# EAGLE board AdapterBoard (EAGLE 5.10)
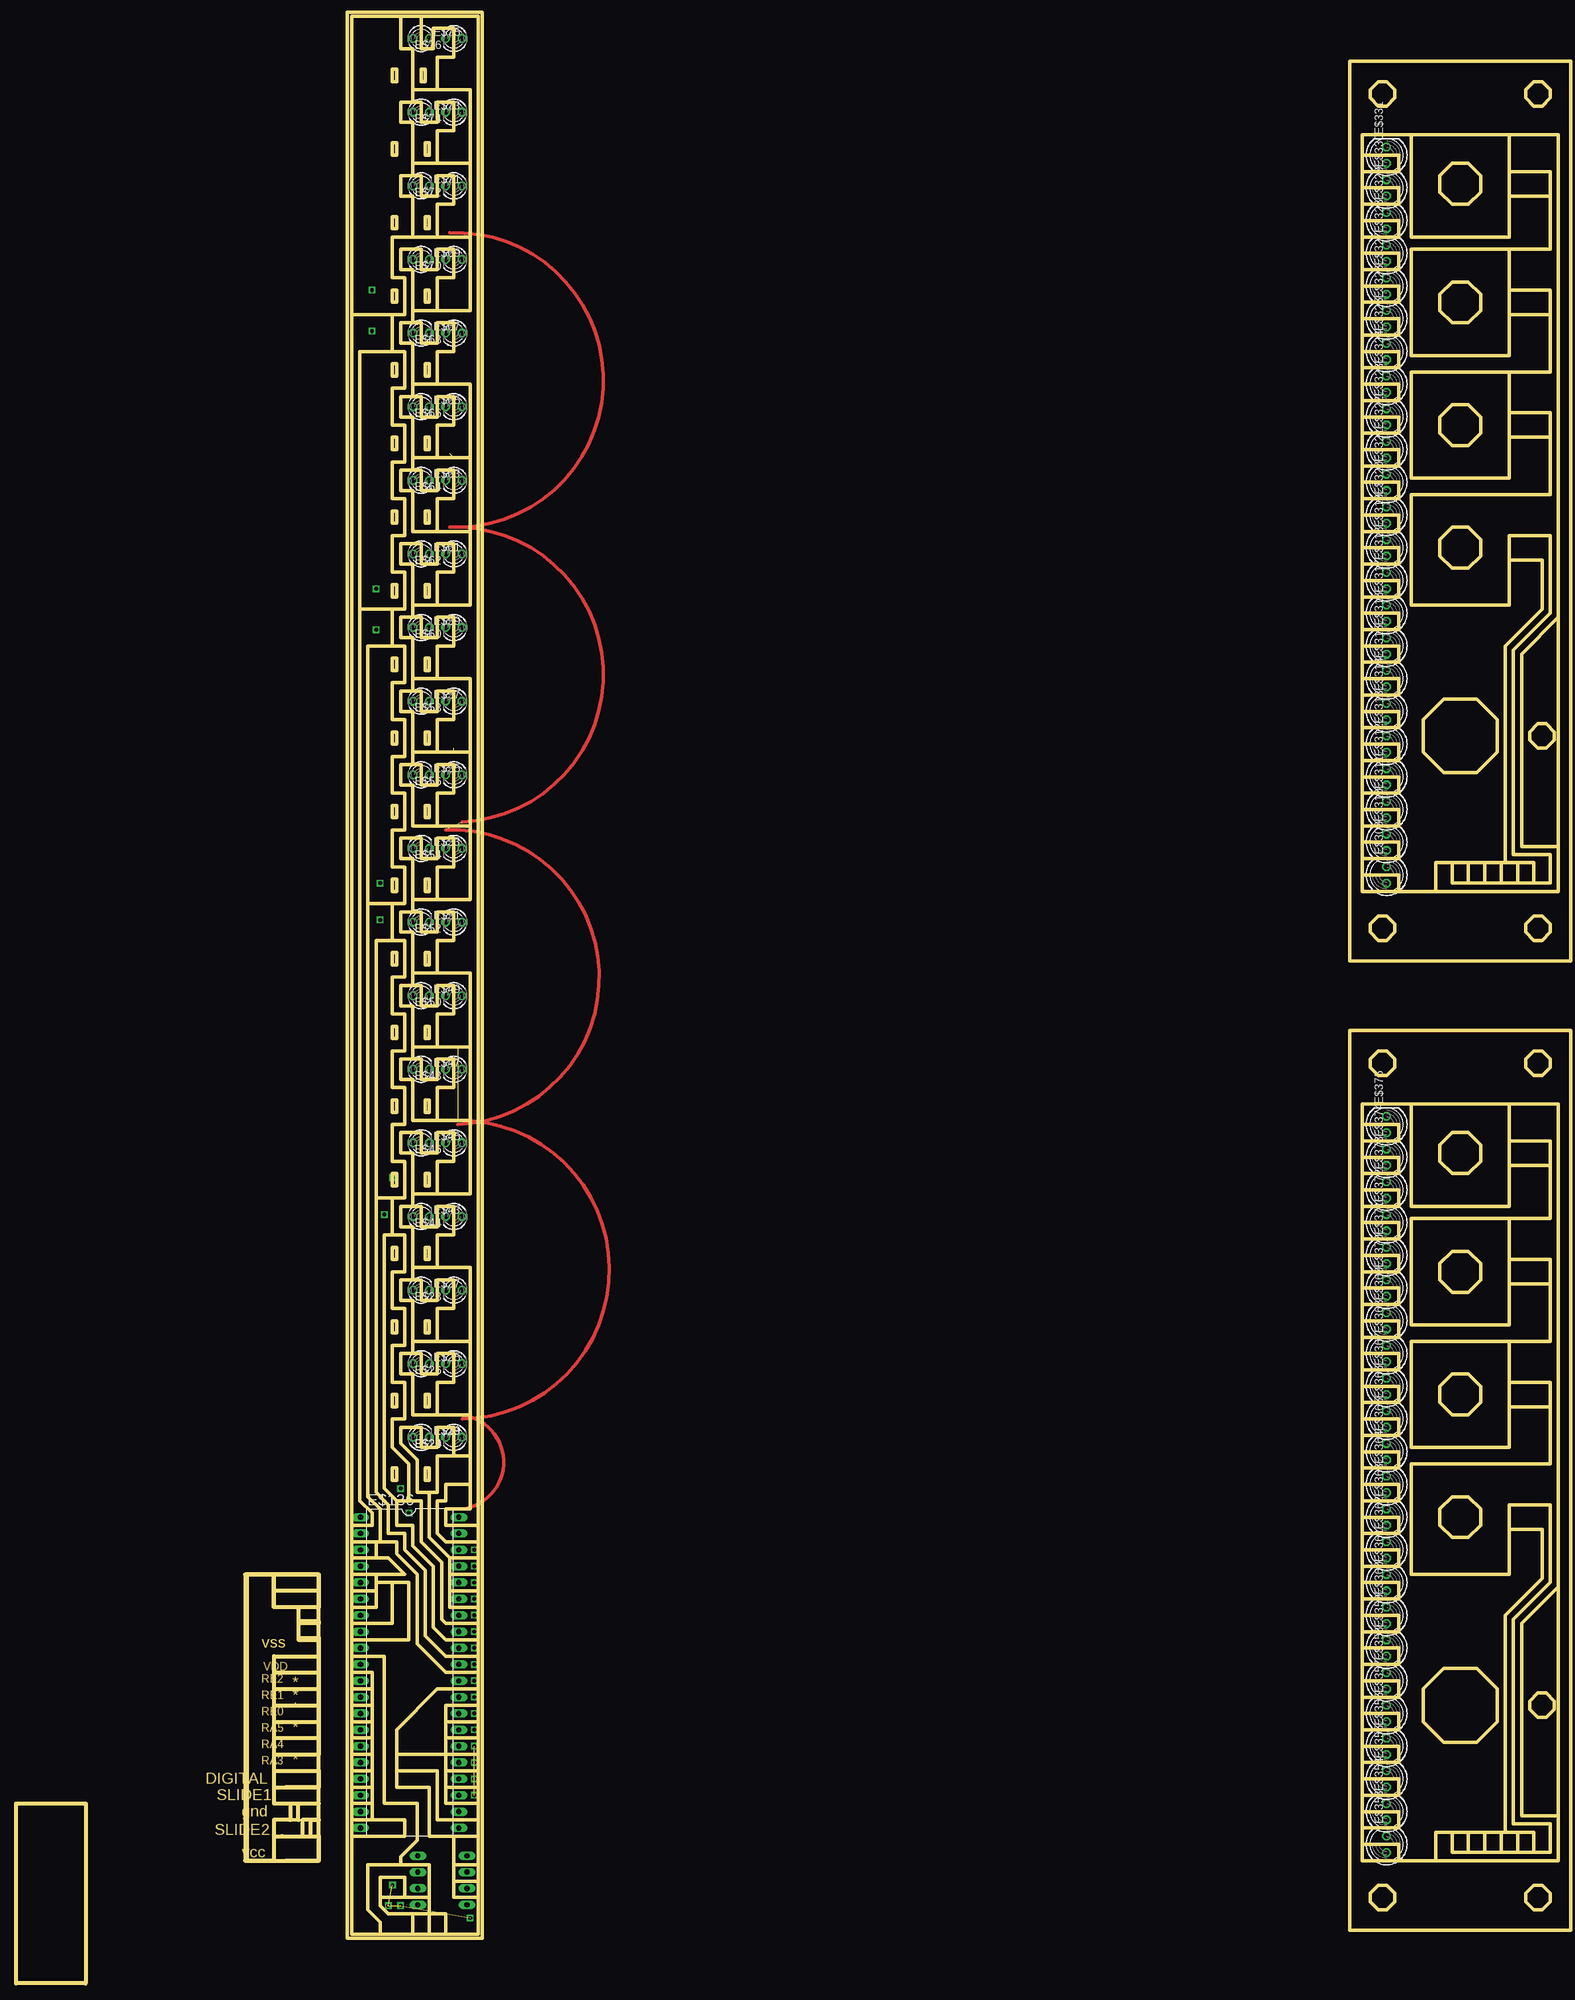
[diagram p0: board, top side]
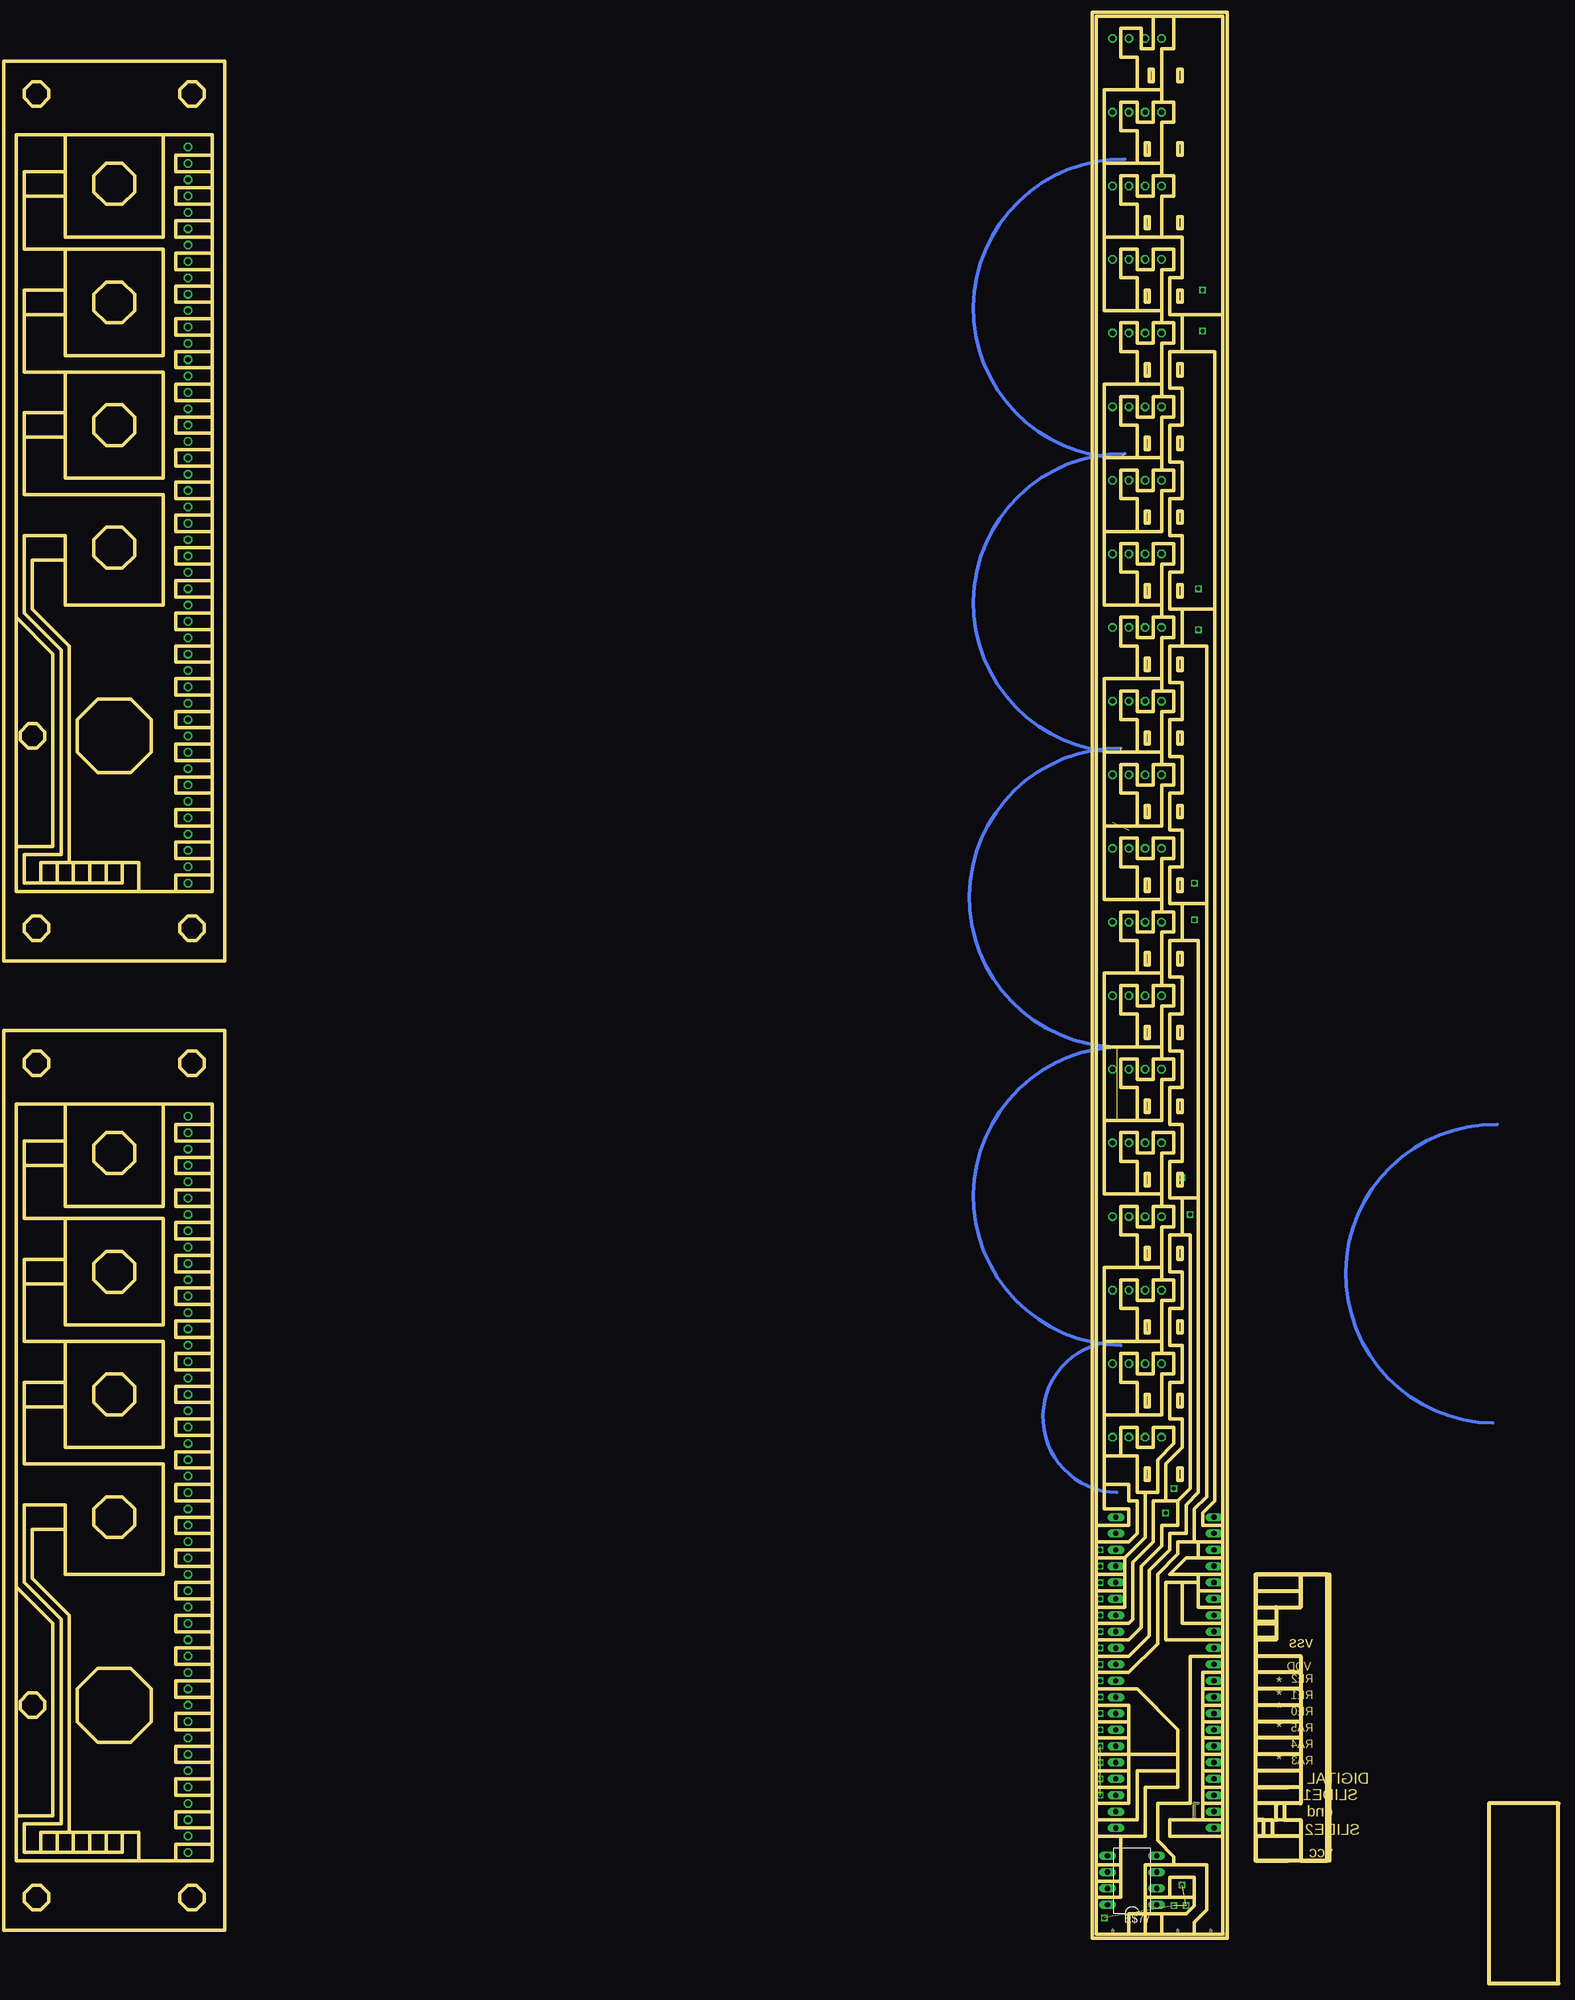
[diagram p1: board, bottom side, seen from below]

Size 239.4 x 305.44 mm. Coordinates in mm from the lower left corner, seen from the top.
Outline: 71.75,71.12 71.75,68.58
Outline: 71.75,68.58 71.75,66.04
Outline: 71.75,66.04 71.75,63.5
Outline: 71.75,63.5 71.75,60.96
Outline: 71.75,58.42 71.75,55.88
Outline: 71.75,48.26 71.75,45.72
Outline: 71.75,38.1 71.75,35.56
Outline: 71.75,35.56 71.75,33.02
Outline: 71.75,33.02 71.75,30.48
Outline: 71.75,30.48 71.75,27.94
Outline: 71.75,27.94 71.75,25.4
Outline: 71.75,25.4 71.75,22.86
Outline: 71.75,22.86 67.95,22.86
Outline: 52.07,22.86 52.07,25.4
Outline: 52.07,25.4 52.07,27.94
Outline: 52.07,27.94 52.07,30.48
Outline: 52.07,30.48 52.07,33.02
Outline: 52.07,33.02 52.07,35.56
Outline: 52.07,35.56 52.07,38.1
Outline: 52.07,38.1 52.07,40.64
Outline: 52.07,40.64 52.07,43.18
Outline: 52.07,43.18 52.07,45.72
Outline: 52.07,45.72 52.07,48.26
Outline: 52.07,48.26 52.07,50.8
Outline: 52.07,50.8 52.07,53.34
Outline: 52.07,53.34 52.07,55.88
Outline: 52.07,55.88 52.07,58.42
Outline: 52.07,58.42 52.07,60.96
Outline: 52.07,60.96 52.07,63.5
Outline: 52.07,66.04 52.07,68.58
Outline: 56.52,68.58 55.88,68.58
Outline: 52.07,58.42 55.88,58.42 55.88,60.96
Outline: 71.75,58.42 67.31,58.42 67.31,60.96
Outline: 71.75,58.42 71.75,60.96
Outline: 71.75,60.96 67.31,60.96
Outline: 67.31,60.96 67.31,63.5
Outline: 71.75,63.5 67.31,63.5
Outline: 67.31,63.5 67.31,66.04
Outline: 71.75,66.04 67.31,66.04
Outline: 52.07,66.04 52.07,63.5
Outline: 52.07,63.5 55.88,63.5
Outline: 55.88,63.5 55.88,62.23
Outline: 55.88,62.23 55.88,60.96
Outline: 55.88,60.96 52.07,60.96
Outline: 71.75,48.26 71.75,50.8
Outline: 71.75,50.8 71.75,53.34
Outline: 71.75,53.34 71.75,55.88
Outline: 52.07,25.4 55.25,25.4
Outline: 55.25,25.4 60.33,25.4 60.33,22.86 52.07,22.86
Outline: 59.05,33.02 59.05,30.48 64.14,30.48 64.14,22.86 67.95,22.86
Outline: 59.05,33.02 65.41,33.02 65.41,25.4 71.75,25.4
Outline: 59.05,33.02 59.05,35.56
Outline: 59.05,35.56 66.67,35.56
Outline: 66.67,35.56 66.67,33.02
Outline: 66.67,33.02 66.67,30.48
Outline: 66.67,30.48 66.67,27.94 71.75,27.94
Outline: 55.25,25.4 55.25,27.94
Outline: 55.25,27.94 55.25,30.48
Outline: 55.25,30.48 55.25,33.02
Outline: 55.25,33.02 55.25,35.56
Outline: 55.25,35.56 55.25,38.1
Outline: 55.25,38.1 55.25,40.64
Outline: 55.25,40.64 55.25,43.18
Outline: 55.25,43.18 55.25,45.72
Outline: 55.25,45.72 55.25,48.26 52.07,48.26
Outline: 52.07,50.8 57.15,50.8 57.15,27.94 62.23,27.94 62.23,22.23 59.69,19.68 59.69,18.41
Outline: 55.25,27.94 52.07,27.94
Outline: 52.07,30.48 55.25,30.48
Outline: 52.07,33.02 55.25,33.02
Outline: 52.07,35.56 55.25,35.56
Outline: 52.07,38.1 55.25,38.1
Outline: 52.07,40.64 55.25,40.64
Outline: 52.07,43.18 55.25,43.18
Outline: 52.07,45.72 55.25,45.72
Outline: 71.75,45.72 71.75,43.18
Outline: 71.75,43.18 71.75,40.64
Outline: 71.75,40.64 71.75,38.1
Outline: 66.67,35.56 71.75,35.56
Outline: 66.67,33.02 71.75,33.02
Outline: 66.67,30.48 71.75,30.48
Outline: 52.07,55.88 58.42,55.88 58.42,62.23
Outline: 66.67,40.64 66.67,43.18 71.75,43.18
Outline: 66.67,40.64 66.67,38.1
Outline: 66.67,38.1 66.67,35.56
Outline: 71.75,38.1 66.67,38.1
Outline: 71.75,40.64 66.67,40.64
Outline: 71.75,45.72 65.41,45.72 59.05,39.37 59.05,35.56
Outline: 52.07,22.86 52.07,7.62 56.52,7.62
Outline: 56.52,7.62 61.59,7.62
Outline: 61.59,7.62 64.14,7.62
Outline: 64.14,7.62 66.67,7.62
Outline: 66.67,7.62 71.75,7.62 71.75,13.34
Outline: 71.75,13.34 71.75,15.88
Outline: 71.75,15.88 71.75,18.41
Outline: 71.75,18.41 71.75,22.86
Outline: 71.75,71.12 66.67,71.12 66.67,73.66 70.48,73.66 70.48,77.47
Outline: 52.07,53.34 60.96,53.34 60.96,62.23 58.42,62.23
Outline: 71.75,48.26 66.67,48.26 62.23,52.7 62.23,63.5 59.05,66.67 59.05,68.58 56.52,68.58
Outline: 71.75,50.8 66.67,50.8 63.5,53.98 63.5,64.14 60.33,67.31 60.33,69.85 57.79,69.85 57.79,74.3 55.88,76.2 55.88,121.92
Outline: 71.75,53.34 66.67,53.34 64.77,55.24 64.77,64.77 61.59,67.95 61.59,71.12 59.05,71.12 59.05,74.93
Outline: 70.48,77.47 70.48,81.92
Outline: 58.42,62.23 55.88,62.23
Outline: 55.88,66.04 55.88,68.58
Outline: 52.07,66.04 55.88,66.04
Outline: 52.07,71.12 55.25,71.12 55.25,73.03 53.34,74.93 53.34,213.36
Outline: 55.88,68.58 52.07,68.58
Outline: 52.07,68.58 52.07,71.12
Outline: 56.52,68.58 56.52,73.66 54.61,75.56 54.61,167.64
Outline: 67.31,66.04 64.14,69.22 64.14,76.2
Outline: 71.75,55.88 66.67,55.88 66.04,56.52 66.04,65.41 62.87,68.58 62.87,74.93 60.96,74.93
Outline: 55.88,66.04 57.79,66.04 60.33,63.5 55.88,63.5
Outline: 58.42,116.2 57.15,116.2 57.15,76.83 59.05,74.93
Outline: 55.88,121.92 55.88,161.93 58.42,161.93
Outline: 54.61,167.64 54.61,207.65 58.42,207.65
Outline: 53.34,213.36 53.34,253.37 58.42,253.37
Outline: 52.07,71.12 52.07,259.08
Outline: 52.07,259.08 52.07,305.44 59.69,305.44
Outline: 67.95,81.92 67.95,86.36 65.41,86.36 65.41,83.19 62.87,83.19 62.87,86.36 59.69,86.36 59.69,83.82 62.23,81.28 62.23,76.2 64.14,76.2
Outline: 67.95,81.92 65.41,81.92 65.41,76.2 64.14,76.2
Outline: 70.48,88.27 70.48,81.92
Outline: 70.48,81.92 67.95,81.92
Outline: 65.41,88.27 61.59,88.27 61.59,94.61 59.69,94.61 59.69,97.79 61.59,97.79
Outline: 65.41,88.27 70.48,88.27
Outline: 61.59,97.79 61.59,99.69
Outline: 61.59,97.79 62.87,97.79 62.87,94.61 65.41,94.61 65.41,97.79 67.95,97.79 67.95,93.34 65.41,93.34 65.41,88.27
Outline: 70.48,99.69 70.48,88.27
Outline: 61.59,99.69 65.41,99.69
Outline: 65.41,99.69 70.48,99.69
Outline: 61.59,99.69 61.59,106.05 59.69,106.05 59.69,109.22 61.59,109.22
Outline: 61.59,109.22 61.59,111.12
Outline: 61.59,109.22 62.87,109.22 62.87,106.05 65.41,106.05 65.41,109.22 67.95,109.22 67.95,104.78 65.41,104.78 65.41,99.69
Outline: 70.48,99.69 70.48,111.12 65.41,111.12
Outline: 58.42,116.2 58.42,121.92
Outline: 58.42,116.2 60.33,116.2 60.33,110.49 58.42,110.49 58.42,104.78 60.33,104.78 60.33,99.06 58.42,99.06 58.42,93.34 60.33,93.34 60.33,87.63 58.42,87.63 58.42,83.19 60.96,80.64 60.96,74.93
Outline: 58.42,121.92 60.33,121.92 60.33,127.64 58.42,127.64 58.42,133.35 60.33,133.35 60.33,139.07 58.42,139.07 58.42,144.78 60.33,144.78 60.33,150.5 58.42,150.5 58.42,156.21 60.33,156.21 60.33,161.93 58.42,161.93
Outline: 61.59,111.12 65.41,111.12
Outline: 61.59,111.12 61.59,117.47 59.69,117.47 59.69,120.65 61.59,120.65
Outline: 61.59,120.65 61.59,122.55
Outline: 61.59,120.65 62.87,120.65 62.87,117.47 65.41,117.47 65.41,120.65 67.95,120.65 67.95,116.2 65.41,116.2 65.41,111.12
Outline: 61.59,122.55 65.41,122.55
Outline: 65.41,122.55 70.48,122.55 70.48,133.99
Outline: 65.41,133.99 61.59,133.99 61.59,140.34 59.69,140.34 59.69,143.51 61.59,143.51
Outline: 65.41,133.99 70.48,133.99
Outline: 61.59,143.51 61.59,145.42
Outline: 61.59,143.51 62.87,143.51 62.87,140.34 65.41,140.34 65.41,143.51 67.95,143.51 67.95,139.07 65.41,139.07 65.41,133.99
Outline: 70.48,145.42 70.48,133.99
Outline: 61.59,145.42 65.41,145.42
Outline: 65.41,145.42 70.48,145.42
Outline: 61.59,145.42 61.59,151.77 59.69,151.77 59.69,154.94 61.59,154.94
Outline: 61.59,154.94 61.59,156.85
Outline: 61.59,154.94 62.87,154.94 62.87,151.77 65.41,151.77 65.41,154.94 67.95,154.94 67.95,150.5 65.41,150.5 65.41,145.42
Outline: 70.48,145.42 70.48,156.85 65.41,156.85
Outline: 58.42,161.93 58.42,167.64
Outline: 58.42,167.64 60.33,167.64 60.33,173.36 58.42,173.36 58.42,179.07 60.33,179.07 60.33,184.79 58.42,184.79 58.42,190.5 60.33,190.5 60.33,196.22 58.42,196.22 58.42,201.93 60.33,201.93 60.33,207.65 58.42,207.65
Outline: 61.59,156.85 65.41,156.85
Outline: 61.59,156.85 61.59,163.2 59.69,163.2 59.69,166.37 61.59,166.37
Outline: 61.59,166.37 61.59,168.28
Outline: 61.59,166.37 62.87,166.37 62.87,163.2 65.41,163.2 65.41,166.37 67.95,166.37 67.95,161.93 65.41,161.93 65.41,156.85
Outline: 61.59,168.28 65.41,168.28
Outline: 65.41,168.28 70.48,168.28 70.48,179.71
Outline: 65.41,179.71 61.59,179.71 61.59,186.06 59.69,186.06 59.69,189.23 61.59,189.23
Outline: 65.41,179.71 70.48,179.71
Outline: 61.59,189.23 61.59,191.14
Outline: 61.59,189.23 62.87,189.23 62.87,186.06 65.41,186.06 65.41,189.23 67.95,189.23 67.95,184.79 65.41,184.79 65.41,179.71
Outline: 70.48,191.14 70.48,179.71
Outline: 61.59,191.14 65.41,191.14
Outline: 65.41,191.14 70.48,191.14
Outline: 61.59,191.14 61.59,197.49 59.69,197.49 59.69,200.66 61.59,200.66
Outline: 61.59,200.66 61.59,202.57
Outline: 61.59,200.66 62.87,200.66 62.87,197.49 65.41,197.49 65.41,200.66 67.95,200.66 67.95,196.22 65.41,196.22 65.41,191.14
Outline: 70.48,191.14 70.48,202.57 65.41,202.57
Outline: 58.42,207.65 58.42,213.36
Outline: 58.42,213.36 60.33,213.36 60.33,219.08 58.42,219.08 58.42,224.79 60.33,224.79 60.33,230.51 58.42,230.51 58.42,236.22 60.33,236.22 60.33,241.94 58.42,241.94 58.42,247.65 60.33,247.65 60.33,253.37 58.42,253.37
Outline: 61.59,202.57 65.41,202.57
Outline: 61.59,202.57 61.59,208.92 59.69,208.92 59.69,212.09 61.59,212.09
Outline: 61.59,212.09 61.59,214
Outline: 61.59,212.09 62.87,212.09 62.87,208.92 65.41,208.92 65.41,212.09 67.95,212.09 67.95,207.65 65.41,207.65 65.41,202.57
Outline: 61.59,214 65.41,214
Outline: 65.41,214 70.48,214 70.48,225.43
Outline: 65.41,225.43 61.59,225.43 61.59,231.78 59.69,231.78 59.69,234.95 61.59,234.95
Outline: 65.41,225.43 70.48,225.43
Outline: 61.59,234.95 61.59,236.86
Outline: 61.59,234.95 62.87,234.95 62.87,231.78 65.41,231.78 65.41,234.95 67.95,234.95 67.95,230.51 65.41,230.51 65.41,225.43
Outline: 70.48,236.86 70.48,225.43
Outline: 61.59,236.86 65.41,236.86
Outline: 65.41,236.86 70.48,236.86
Outline: 61.59,236.86 61.59,243.21 59.69,243.21 59.69,246.38 61.59,246.38
Outline: 61.59,246.38 61.59,248.29
Outline: 61.59,246.38 62.87,246.38 62.87,243.21 65.41,243.21 65.41,246.38 67.95,246.38 67.95,241.94 65.41,241.94 65.41,236.86
Outline: 70.48,236.86 70.48,248.29 65.41,248.29
Outline: 58.42,253.37 58.42,259.08
Outline: 58.42,259.08 60.33,259.08 60.33,264.8 58.42,264.8 58.42,271.15 61.59,271.15
Outline: 61.59,248.29 65.41,248.29
Outline: 61.59,248.29 61.59,254.64 59.69,254.64 59.69,257.81 61.59,257.81
Outline: 61.59,257.81 61.59,259.71
Outline: 61.59,257.81 62.87,257.81 62.87,254.64 65.41,254.64 65.41,257.81 67.95,257.81 67.95,253.37 65.41,253.37 65.41,248.29
Outline: 61.59,259.71 65.41,259.71
Outline: 65.41,259.71 70.48,259.71 70.48,271.15
Outline: 61.59,271.15 65.41,271.15
Outline: 65.41,271.15 70.48,271.15
Outline: 61.59,271.15 61.59,277.5 59.69,277.5 59.69,280.67 61.59,280.67
Outline: 61.59,280.67 61.59,282.57
Outline: 61.59,280.67 62.87,280.67 62.87,277.5 65.41,277.5 65.41,280.67 67.95,280.67 67.95,276.23 65.41,276.23 65.41,271.15
Outline: 70.48,282.57 70.48,271.15
Outline: 61.59,282.57 65.41,282.57
Outline: 65.41,282.57 70.48,282.57
Outline: 61.59,282.57 61.59,288.93 59.69,288.93 59.69,292.1 61.59,292.1
Outline: 61.59,292.1 61.59,294
Outline: 61.59,292.1 62.87,292.1 62.87,288.93 65.41,288.93 65.41,292.1 67.95,292.1 67.95,287.66 65.41,287.66 65.41,282.57
Outline: 70.48,282.57 70.48,294 65.41,294
Outline: 61.59,294 65.41,294
Outline: 61.59,294 61.59,300.36 59.69,300.36 59.69,305.44
Outline: 62.87,305.44 62.87,300.36 64.77,300.36 64.77,303.53 67.95,303.53 67.95,299.09 65.41,299.09 65.41,294
Outline: 59.69,305.44 62.87,305.44
Outline: 62.87,305.44 71.75,305.44 71.75,71.12
Outline: 70.48,77.47 66.67,77.47 66.67,74.93 65.41,74.93 65.41,69.85 66.67,68.58 71.75,68.58
Outline: 61.59,122.55 61.59,128.91 59.69,128.91 59.69,132.08 62.87,132.08 62.87,128.91 65.41,128.91 65.41,132.08 67.95,132.08 67.95,127.64 65.41,127.64 65.41,122.55
Outline: 61.59,168.28 61.59,174.62 59.69,174.62 59.69,177.8 62.87,177.8 62.87,174.62 65.41,174.62 65.41,177.8 67.95,177.8 67.95,173.36 65.41,173.36 65.41,168.28
Outline: 61.59,214 61.59,220.35 59.69,220.35 59.69,223.52 62.87,223.52 62.87,220.35 65.41,220.35 65.41,223.52 67.95,223.52 67.95,219.08 65.41,219.08 65.41,214
Outline: 61.59,259.71 61.59,266.06 59.69,266.06 59.69,269.24 62.87,269.24 62.87,266.06 65.41,266.06 65.41,269.24 67.95,269.24 67.95,264.8 65.41,264.8 65.41,259.71
Outline: 64.14,13.34 64.14,18.41 59.69,18.41
Outline: 64.14,13.34 64.14,10.79
Outline: 71.75,13.34 67.95,13.34 67.95,15.88
Outline: 64.14,13.34 60.33,13.34
Outline: 71.75,15.88 67.95,15.88
Outline: 67.95,15.88 67.95,18.41
Outline: 67.95,18.41 71.75,18.41
Outline: 61.59,10.79 64.14,10.79
Outline: 60.33,13.34 60.33,16.51 56.52,16.51 56.52,13.34
Outline: 66.67,7.62 66.67,10.79 64.14,10.79
Outline: 59.69,18.41 54.61,18.41 54.61,11.43 56.52,9.53 56.52,7.62
Outline: 61.59,7.62 61.59,10.79
Outline: 64.14,7.62 64.14,10.79
Outline: 67.95,18.41 67.95,22.86
Outline: 61.59,10.79 57.79,10.79 56.52,12.07 56.52,13.34
Outline: 60.33,13.34 56.52,13.34
Outline: 233.05,20.32 238.12,20.32 238.12,24.77 232.41,24.77 232.41,56.52 238.12,62.23 238.12,74.3 231.78,74.3 231.78,70.48
Outline: 233.05,20.32 230.5,20.32
Outline: 230.5,20.32 227.97,20.32
Outline: 227.97,20.32 225.43,20.32
Outline: 225.43,20.32 222.88,20.32 222.88,23.5
Outline: 230.5,23.5 230.5,20.32
Outline: 227.97,23.5 227.97,20.32
Outline: 208.91,21.59 208.91,19.05 214.63,19.05
Outline: 208.91,21.59 208.91,24.13
Outline: 208.91,24.13 208.91,26.67
Outline: 208.91,26.67 208.91,136.53 216.53,136.53
Outline: 220.34,19.05 239.4,19.05 239.4,26.04
Outline: 225.43,23.5 225.43,20.32
Outline: 233.05,23.5 233.05,20.32
Outline: 235.59,20.32 235.59,23.5 233.05,23.5
Outline: 231.78,70.48 231.78,63.5 216.53,63.5 216.53,80.64 238.12,80.64 238.12,93.34 231.78,93.34
Outline: 231.78,70.48 236.85,70.48 236.85,62.87 231.14,57.15 231.14,23.5
Outline: 231.78,93.34 231.78,89.53
Outline: 231.78,93.34 231.78,99.69
Outline: 231.78,89.53 238.12,89.53
Outline: 231.78,112.39 231.78,108.58
Outline: 231.78,108.58 231.78,102.23 216.53,102.23 216.53,118.75 231.78,118.75
Outline: 231.78,112.39 231.78,118.75
Outline: 231.78,108.58 238.12,108.58
Outline: 231.78,112.39 238.12,112.39 238.12,99.69 231.78,99.69
Outline: 231.78,130.81 231.78,127
Outline: 231.78,127 231.78,120.65 216.53,120.65 216.53,136.53
Outline: 231.78,130.81 231.78,136.53
Outline: 231.78,136.53 216.53,136.53
Outline: 231.78,127 238.12,127
Outline: 231.78,130.81 238.12,130.81 238.12,118.75 231.78,118.75
Outline: 239.4,26.04 239.4,61.59
Outline: 231.78,136.53 239.4,136.53 239.4,61.59
Outline: 231.78,89.53 231.78,83.19 216.53,83.19 216.53,99.69 231.78,99.69
Outline: 230.5,23.5 227.97,23.5
Outline: 227.97,23.5 225.43,23.5
Outline: 225.43,23.5 222.88,23.5
Outline: 222.88,23.5 220.34,23.5 220.34,19.05
Outline: 220.34,19.05 214.63,19.05
Outline: 233.05,23.5 231.14,23.5
Outline: 231.14,23.5 230.5,23.5
Outline: 239.4,26.04 233.68,26.04 233.68,55.88 239.4,61.59
Outline: 208.91,21.59 214.63,21.59 214.63,19.05
Outline: 208.91,24.13 214.63,24.13 214.63,26.67 208.91,26.67
Outline: 208.91,29.21 214.63,29.21 214.63,31.75 208.91,31.75
Outline: 208.91,34.29 214.63,34.29 214.63,36.83 208.91,36.83
Outline: 208.91,39.37 214.63,39.37 214.63,41.91 208.91,41.91
Outline: 208.91,44.45 214.63,44.45 214.63,46.99 208.91,46.99
Outline: 208.91,49.53 214.63,49.53 214.63,52.07 208.91,52.07
Outline: 208.91,54.61 214.63,54.61 214.63,57.15 208.91,57.15
Outline: 208.91,59.69 214.63,59.69 214.63,62.23 208.91,62.23
Outline: 208.91,64.77 214.63,64.77 214.63,67.31 208.91,67.31
Outline: 208.91,69.85 214.63,69.85 214.63,72.39 208.91,72.39
Outline: 208.91,74.93 214.63,74.93 214.63,77.47 208.91,77.47
Outline: 208.91,80.01 214.63,80.01 214.63,82.55 208.91,82.55
Outline: 208.91,85.09 214.63,85.09 214.63,87.63 208.91,87.63
Outline: 208.91,90.17 214.63,90.17 214.63,92.71 208.91,92.71
Outline: 208.91,95.25 214.63,95.25 214.63,97.79 208.91,97.79
Outline: 208.91,100.33 214.63,100.33 214.63,102.87 208.91,102.87
Outline: 208.91,105.41 214.63,105.41 214.63,107.95 208.91,107.95
Outline: 208.91,110.49 214.63,110.49 214.63,113.03 208.91,113.03
Outline: 208.91,115.57 214.63,115.57 214.63,118.11 208.91,118.11
Outline: 208.91,120.65 214.63,120.65 214.63,123.19 208.91,123.19
Outline: 208.91,125.73 214.63,125.73 214.63,128.27 208.91,128.27
Outline: 208.91,130.81 214.63,130.81 214.63,133.35 208.91,133.35
Outline: 233.05,170.82 238.12,170.82 238.12,175.26 232.41,175.26 232.41,207.01 238.12,212.73 238.12,224.79 231.78,224.79 231.78,220.98
Outline: 233.05,170.82 230.5,170.82
Outline: 230.5,170.82 227.97,170.82
Outline: 227.97,170.82 225.43,170.82
Outline: 225.43,170.82 222.88,170.82 222.88,173.99
Outline: 230.5,173.99 230.5,170.82
Outline: 227.97,173.99 227.97,170.82
Outline: 208.91,172.09 208.91,169.55 214.63,169.55
Outline: 208.91,172.09 208.91,174.62
Outline: 208.91,174.62 208.91,177.17
Outline: 208.91,177.17 208.91,287.02 216.53,287.02
Outline: 220.34,169.55 239.4,169.55 239.4,176.53
Outline: 225.43,173.99 225.43,170.82
Outline: 233.05,173.99 233.05,170.82
Outline: 235.59,170.82 235.59,173.99 233.05,173.99
Outline: 231.78,220.98 231.78,214 216.53,214 216.53,231.14 238.12,231.14 238.12,243.84 231.78,243.84
Outline: 231.78,220.98 236.85,220.98 236.85,213.36 231.14,207.65 231.14,173.99
Outline: 231.78,243.84 231.78,240.03
Outline: 231.78,243.84 231.78,250.19
Outline: 231.78,240.03 238.12,240.03
Outline: 231.78,262.89 231.78,259.08
Outline: 231.78,259.08 231.78,252.73 216.53,252.73 216.53,269.24 231.78,269.24
Outline: 231.78,262.89 231.78,269.24
Outline: 231.78,259.08 238.12,259.08
Outline: 231.78,262.89 238.12,262.89 238.12,250.19 231.78,250.19
Outline: 231.78,281.31 231.78,277.5
Outline: 231.78,277.5 231.78,271.15 216.53,271.15 216.53,287.02
Outline: 231.78,281.31 231.78,287.02
Outline: 231.78,287.02 216.53,287.02
Outline: 231.78,277.5 238.12,277.5
Outline: 231.78,281.31 238.12,281.31 238.12,269.24 231.78,269.24
Outline: 239.4,176.53 239.4,212.09
Outline: 231.78,287.02 239.4,287.02 239.4,212.09
Outline: 231.78,240.03 231.78,233.68 216.53,233.68 216.53,250.19 231.78,250.19
Outline: 230.5,173.99 227.97,173.99
Outline: 227.97,173.99 225.43,173.99
Outline: 225.43,173.99 222.88,173.99
Outline: 222.88,173.99 220.34,173.99 220.34,169.55
Outline: 220.34,169.55 214.63,169.55
Outline: 233.05,173.99 231.14,173.99
Outline: 231.14,173.99 230.5,173.99
Outline: 239.4,176.53 233.68,176.53 233.68,206.38 239.4,212.09
Outline: 208.91,172.09 214.63,172.09 214.63,169.55
Outline: 208.91,174.62 214.63,174.62 214.63,177.17 208.91,177.17
Outline: 208.91,179.71 214.63,179.71 214.63,182.25 208.91,182.25
Outline: 208.91,184.79 214.63,184.79 214.63,187.33 208.91,187.33
Outline: 208.91,189.87 214.63,189.87 214.63,192.41 208.91,192.41
Outline: 208.91,194.95 214.63,194.95 214.63,197.49 208.91,197.49
Outline: 208.91,200.03 214.63,200.03 214.63,202.57 208.91,202.57
Outline: 208.91,205.11 214.63,205.11 214.63,207.65 208.91,207.65
Outline: 208.91,210.19 214.63,210.19 214.63,212.73 208.91,212.73
Outline: 208.91,215.27 214.63,215.27 214.63,217.81 208.91,217.81
Outline: 208.91,220.35 214.63,220.35 214.63,222.89 208.91,222.89
Outline: 208.91,225.43 214.63,225.43 214.63,227.97 208.91,227.97
Outline: 208.91,230.51 214.63,230.51 214.63,233.05 208.91,233.05
Outline: 208.91,235.59 214.63,235.59 214.63,238.12 208.91,238.12
Outline: 208.91,240.67 214.63,240.67 214.63,243.21 208.91,243.21
Outline: 208.91,245.75 214.63,245.75 214.63,248.29 208.91,248.29
Outline: 208.91,250.83 214.63,250.83 214.63,253.37 208.91,253.37
Outline: 208.91,255.91 214.63,255.91 214.63,258.44 208.91,258.44
Outline: 208.91,260.99 214.63,260.99 214.63,263.53 208.91,263.53
Outline: 208.91,266.06 214.63,266.06 214.63,268.61 208.91,268.61
Outline: 208.91,271.15 214.63,271.15 214.63,273.69 208.91,273.69
Outline: 208.91,276.23 214.63,276.23 214.63,278.76 208.91,278.76
Outline: 208.91,281.31 214.63,281.31 214.63,283.85 208.91,283.85
Outline: 58.42,121.92 55.88,121.92
Outline: 58.42,167.64 54.61,167.64
Outline: 58.42,213.36 53.34,213.36
Outline: 58.42,259.08 52.07,259.08
Outline: 60.96,74.93 59.05,74.93
Outline: 46.99,60.96 46.99,63.5 40.01,63.5
Outline: 46.99,60.96 40.01,60.96
Outline: 40.01,60.96 40.01,63.5
Outline: 46.99,60.96 46.99,58.42
Outline: 46.99,58.42 43.82,58.42
Outline: 43.82,58.42 40.01,58.42 40.01,60.96
Outline: 43.82,58.42 43.82,55.88
Outline: 43.82,55.88 43.82,53.34 46.99,53.34
Outline: 46.99,53.34 46.99,55.88
Outline: 46.99,55.88 46.99,58.42
Outline: 46.99,55.88 43.82,55.88
Outline: 46.99,50.8 40.01,50.8 40.01,48.26
Outline: 46.99,50.8 46.99,53.34
Outline: 40.01,63.5 35.56,63.5 35.56,19.05 40.01,19.05
Outline: 40.01,19.05 46.99,19.05 46.99,22.86
Outline: 46.99,22.86 46.99,25.4
Outline: 46.99,25.4 46.99,27.94
Outline: 46.99,27.94 46.99,30.48
Outline: 46.99,30.48 46.99,33.02
Outline: 46.99,33.02 46.99,35.56
Outline: 46.99,35.56 46.99,38.1
Outline: 46.99,38.1 46.99,40.64
Outline: 46.99,40.64 46.99,43.18
Outline: 46.99,43.18 46.99,45.72
Outline: 46.99,45.72 46.99,48.26
Outline: 46.99,48.26 46.99,50.8
Outline: 40.01,48.26 40.01,45.72
Outline: 40.01,45.72 40.01,43.18
Outline: 40.01,43.18 40.01,40.64
Outline: 40.01,40.64 40.01,38.1
Outline: 40.01,38.1 40.01,35.56
Outline: 40.01,35.56 40.01,33.02
Outline: 40.01,33.02 40.01,30.48
Outline: 40.01,30.48 40.01,27.94 42.55,27.94
Outline: 42.55,27.94 42.55,25.4 40.01,25.4 40.01,22.86
Outline: 40.01,22.86 40.01,19.05
Outline: 40.01,22.86 44.45,22.86
Outline: 44.45,22.86 46.99,22.86
Outline: 46.99,25.4 44.45,25.4 44.45,22.86
Outline: 42.55,27.94 46.99,27.94
Outline: 40.01,30.48 46.99,30.48
Outline: 40.01,33.02 46.99,33.02
Outline: 40.01,35.56 46.99,35.56
Outline: 40.01,38.1 46.99,38.1
Outline: 40.01,40.64 46.99,40.64
Outline: 40.01,43.18 46.99,43.18
Outline: 40.01,45.72 46.99,45.72
Outline: 40.01,48.26 46.99,48.26
Outline: 10.8,27.94 10.8,0 0,0 0,27.94 10.8,27.94
Copper layers (1*16): Top 0.035mm / dielectric 1.5mm / Bottom 0.035mm
Design rules "default": minimum track width 10mil, minimum drill 24mil, track to track 8mil, track to pad 8mil, pad to pad 8mil, via to via 8mil, smd to smd 8mil, copper to edge 40mil, drill to drill 8mil, minimum pad ring 10mil, minimum via ring 8mil, stop-mask expansion 4mil, vias tented up to drill 0mil, thermal gap 10mil
Milling: 398 lines

## Footprints (pad centres in the part's own frame; a part is rotated, then mirrored left to right if it is on the bottom)
LED3MM = drill 0.813 octagon: A -1.27,0; K 1.27,0
DIL08 = drill 0.813 long: 1 -3.81,-3.81; 2 -1.27,-3.81; 3 1.27,-3.81; 4 3.81,-3.81; 5 3.81,3.81; 6 1.27,3.81; 7 -1.27,3.81; 8 -3.81,3.81
DIL40 = drill 0.813 long: 1 -24.13,-7.62; 2 -21.59,-7.62; 3 -19.05,-7.62; 4 -16.51,-7.62; 5 -13.97,-7.62; 6 -11.43,-7.62; 7 -8.89,-7.62; 8 -6.35,-7.62; 9 -3.81,-7.62; 10 -1.27,-7.62; 11 1.27,-7.62; 12 3.81,-7.62; 13 6.35,-7.62; 14 8.89,-7.62; 15 11.43,-7.62; 16 13.97,-7.62; 17 16.51,-7.62; 18 19.05,-7.62; 19 21.59,-7.62; 20 24.13,-7.62; 21 24.13,7.62; 22 21.59,7.62; 23 19.05,7.62; 24 16.51,7.62; 25 13.97,7.62; 26 11.43,7.62; 27 8.89,7.62; 28 6.35,7.62; 29 3.81,7.62; 30 1.27,7.62; 31 -1.27,7.62; 32 -3.81,7.62; 33 -6.35,7.62; 34 -8.89,7.62; 35 -11.43,7.62; 36 -13.97,7.62; 37 -16.51,7.62; 38 -19.05,7.62; 39 -21.59,7.62; 40 -24.13,7.62
LED5MM = drill 0.813 octagon: A -1.27,0; K 1.27,0

## Placement (x,y rotation side)
E$19  [LED3MM]  62.87,84.77 0 top
E$20  [LED3MM]  67.95,84.77 180 top
E$23  [LED3MM]  62.87,84.77 0 top
E$24  [LED3MM]  67.95,84.77 180 top
E$25  [LED3MM]  62.87,96.2 0 top
E$26  [LED3MM]  67.95,96.2 180 top
E$27  [LED3MM]  62.87,107.63 0 top
E$28  [LED3MM]  67.95,107.63 180 top
E$43  [LED3MM]  62.87,119.06 0 top
E$44  [LED3MM]  67.95,119.06 180 top
E$45  [LED3MM]  62.87,130.49 0 top
E$46  [LED3MM]  67.95,130.49 180 top
E$47  [LED3MM]  62.87,141.92 0 top
E$48  [LED3MM]  67.95,141.92 180 top
E$49  [LED3MM]  62.87,153.35 0 top
E$50  [LED3MM]  67.95,153.35 180 top
E$51  [LED3MM]  62.87,164.78 0 top
E$52  [LED3MM]  67.95,164.78 180 top
E$53  [LED3MM]  62.87,176.21 0 top
E$54  [LED3MM]  67.95,176.21 180 top
E$55  [LED3MM]  62.87,187.64 0 top
E$56  [LED3MM]  67.95,187.64 180 top
E$57  [LED3MM]  62.87,199.07 0 top
E$58  [LED3MM]  67.95,199.07 180 top
E$59  [LED3MM]  62.87,210.5 0 top
E$60  [LED3MM]  67.95,210.5 180 top
E$61  [LED3MM]  62.87,221.93 0 top
E$62  [LED3MM]  67.95,221.93 180 top
E$63  [LED3MM]  62.87,233.36 0 top
E$64  [LED3MM]  67.95,233.36 180 top
E$65  [LED3MM]  62.87,244.79 0 top
E$66  [LED3MM]  67.95,244.79 180 top
E$67  [LED3MM]  62.87,256.22 0 top
E$68  [LED3MM]  67.95,256.22 180 top
E$69  [LED3MM]  62.87,267.65 0 top
E$70  [LED3MM]  67.95,267.65 180 top
E$71  [LED3MM]  62.87,279.08 0 top
E$72  [LED3MM]  67.95,279.08 180 top
E$73  [LED3MM]  62.87,290.51 0 top
E$74  [LED3MM]  67.95,290.51 180 top
E$75  [LED3MM]  62.87,301.94 0 top
E$76  [LED3MM]  67.95,301.94 180 top
E$77  [DIL08]  66.17,16 90 bottom
E$136  [DIL40]  61.09,48.26 270 top
E$309  [LED5MM]  212.72,172.09 90 top
E$310  [LED5MM]  212.72,177.17 90 top
E$311  [LED5MM]  212.72,182.25 90 top
E$312  [LED5MM]  212.72,187.33 90 top
E$313  [LED5MM]  212.72,192.41 90 top
E$314  [LED5MM]  212.72,197.49 90 top
E$315  [LED5MM]  212.72,202.57 90 top
E$316  [LED5MM]  212.72,207.65 90 top
E$317  [LED5MM]  212.72,212.73 90 top
E$318  [LED5MM]  212.72,217.81 90 top
E$319  [LED5MM]  212.72,222.89 90 top
E$320  [LED5MM]  212.72,227.97 90 top
E$321  [LED5MM]  212.72,233.05 90 top
E$322  [LED5MM]  212.72,238.12 90 top
E$323  [LED5MM]  212.72,243.21 90 top
E$324  [LED5MM]  212.72,248.29 90 top
E$325  [LED5MM]  212.72,253.37 90 top
E$326  [LED5MM]  212.72,258.44 90 top
E$327  [LED5MM]  212.72,263.53 90 top
E$328  [LED5MM]  212.72,268.61 90 top
E$329  [LED5MM]  212.72,273.69 90 top
E$330  [LED5MM]  212.72,278.76 90 top
E$331  [LED5MM]  212.72,283.85 90 top
E$353  [LED5MM]  212.72,21.59 90 top
E$354  [LED5MM]  212.72,26.67 90 top
E$355  [LED5MM]  212.72,31.75 90 top
E$356  [LED5MM]  212.72,36.83 90 top
E$357  [LED5MM]  212.72,41.91 90 top
E$358  [LED5MM]  212.72,46.99 90 top
E$359  [LED5MM]  212.72,52.07 90 top
E$360  [LED5MM]  212.72,57.15 90 top
E$361  [LED5MM]  212.72,62.23 90 top
E$362  [LED5MM]  212.72,67.31 90 top
E$363  [LED5MM]  212.72,72.39 90 top
E$364  [LED5MM]  212.72,77.47 90 top
E$365  [LED5MM]  212.72,82.55 90 top
E$366  [LED5MM]  212.72,87.63 90 top
E$367  [LED5MM]  212.72,92.71 90 top
E$368  [LED5MM]  212.72,97.79 90 top
E$369  [LED5MM]  212.72,102.87 90 top
E$370  [LED5MM]  212.72,107.95 90 top
E$371  [LED5MM]  212.72,113.03 90 top
E$372  [LED5MM]  212.72,118.11 90 top
E$373  [LED5MM]  212.72,123.19 90 top
E$374  [LED5MM]  212.72,128.27 90 top
E$375  [LED5MM]  212.72,133.35 90 top

## Library data of the parts
E$19 E$20 E$23-E$28 E$43-E$76 E$309-E$331 E$353-E$375 = led
E$77 = 40xx
E$136 = 74xx-eu

## Tracks (layer width: path | path; a pad name or v marks a point on that pad's centre or on a via)
S$1
  Top 0.508: 69.22,73.66 arc171 68.58,88.27
S$2  (4 unrouted)
  Top 0.508: 68.58,133.99 arc-180 69.22,87.63
  Bottom 0.508: 67.31,145.42 arc-180 67.95,99.06 | 67.95,191.77 arc-180 68.58,145.42 | 67.31,237.49 arc-180 67.95,191.14 | 67.31,283.21 arc-180 67.95,236.86
S$3  (1 unrouted)
  Top 0.508: 68.58,133.35 arc180 66.67,179.07 | 69.22,226.06 arc-175 69.22,180.34 | 69.22,226.06 arc5 67.31,226.06 | 67.31,271.78 arc-180 69.22,226.06
S$4
  Bottom 0.508: 68.58,76.2 arc180 67.95,99.69
S$5  (via drill 0.6)  (3 unrouted)
  other vias: 58.42,15.24 57.79,12.07 70.48,10.16 59.69,12.07
S$6  (via drill 0.6)
  other vias: 71.12,67.31
S$7  (via drill 0.6)
  other vias: 71.12,64.77
S$8  (via drill 0.6)
  other vias: 71.12,62.23
S$9  (via drill 0.6)
  other vias: 71.12,59.69
S$10  (via drill 0.6)
  other vias: 71.12,57.15
S$11  (via drill 0.6)
  other vias: 71.12,54.61
S$12  (via drill 0.6)
  other vias: 71.12,52.07
S$13  (via drill 0.6)
  other vias: 71.12,49.53
S$14  (via drill 0.6)
  other vias: 71.12,46.99
S$15  (via drill 0.6)
  other vias: 71.12,44.45
S$16  (via drill 0.6)
  other vias: 71.12,41.91
S$17  (via drill 0.6)
  other vias: 71.12,39.37
S$18  (via drill 0.6)  (3 unrouted)
  other vias: 71.12,36.83 71.12,34.29 71.12,31.75 71.12,29.21
S$19  (via drill 0.6)
  other vias: 55.25,256.54
S$20  (via drill 0.6)
  other vias: 55.25,262.89
S$21  (via drill 0.6)
  other vias: 55.88,210.19
S$22  (via drill 0.6)
  other vias: 55.88,216.54
S$23  (via drill 0.6)
  other vias: 56.52,165.1
S$24  (via drill 0.6)
  other vias: 56.52,170.82
S$25  (via drill 0.6)
  other vias: 57.15,119.38
S$26  (via drill 0.6)
  other vias: 58.42,125.09
S$27  (via drill 0.6)
  other vias: 60.96,73.03
S$28  (via drill 0.6)
  other vias: 59.69,76.83
S$103
  Bottom 0.508: 10.16,87 arc180 9.53,133.35

## Text on the board
Unrouted: Vss | 22 | 21 | Vss | 20 | 19 | 18 | 17 | 16 | 15 | 14 | 13 | 12 | 11 | 10 | 9 | 8 | 7 | 6 | 5 | 4 | 3 | 2 | * | * | * | * | * | VDD | RE2 | RE1 | RE0 | RA5 | RA4 | RA3 | 1 | Vss | 22 | 21 | Vss | 20 | 19 | 18 | 17 | 16 | 15 | 14 | 13 | 12 | 11 | VUSB | 10 | RC2 | RC1 | RC6 | 9 | RC0 | OSC2 | 8 | OSC1 | VSS | 7 | VDD | RE2 | 6 | * | RE1 | VDD | * | RE0 | RB0 | SCL | * | * | 5 | RA5 | RB1 | * | * | RA4 | RB2 | 4 | * | RA3 | RB3 | * | * | RA2 | RB4 | * | * | 3 | RA1 | RB5 | * | RA0 | PGC | * | 2 | MCLR | PGD | * | * | * | * | * | VDD | RE2 | RE1 | RE0 | RA5 | RA4 | RA3 | 1 | V+ | outA | OUTB | INA- | INB- | INA+ | INB+ | V-
Milling: vss | VDD | RE2 | * | RE1 | * | RE0 | * | RA5 | * | RA4 | RA3 | * | DIGITAL | SLIDE1 | gnd | SLIDE2 | vcc